# Altium PCB RF-learn-command-1relay.PcbDoc
Units mm, origin at the board's own origin, x right, y up, seen from the top; angles counter-clockwise.
Board outline 72 x 47 mm, 2 copper layers (Top Layer, Bottom Layer); 45 components, 34 nets, 130 pads, 82 vias.
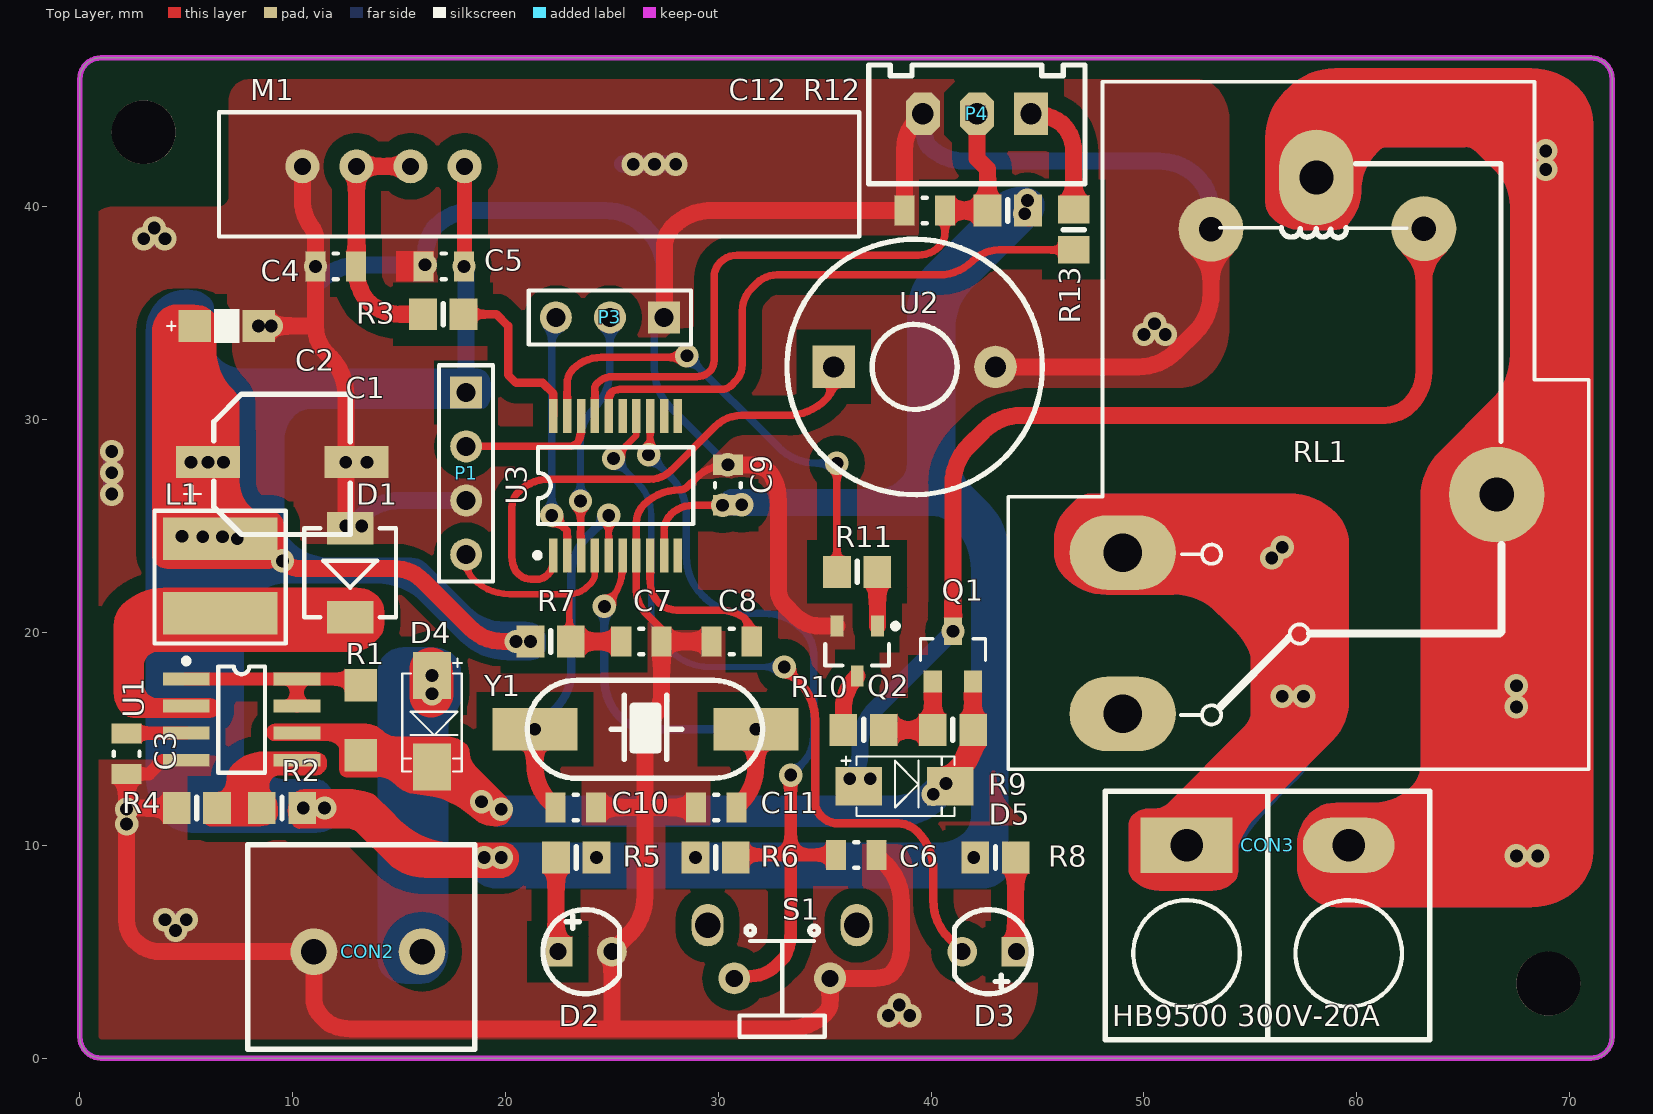
[diagram p0: Top Layer view]
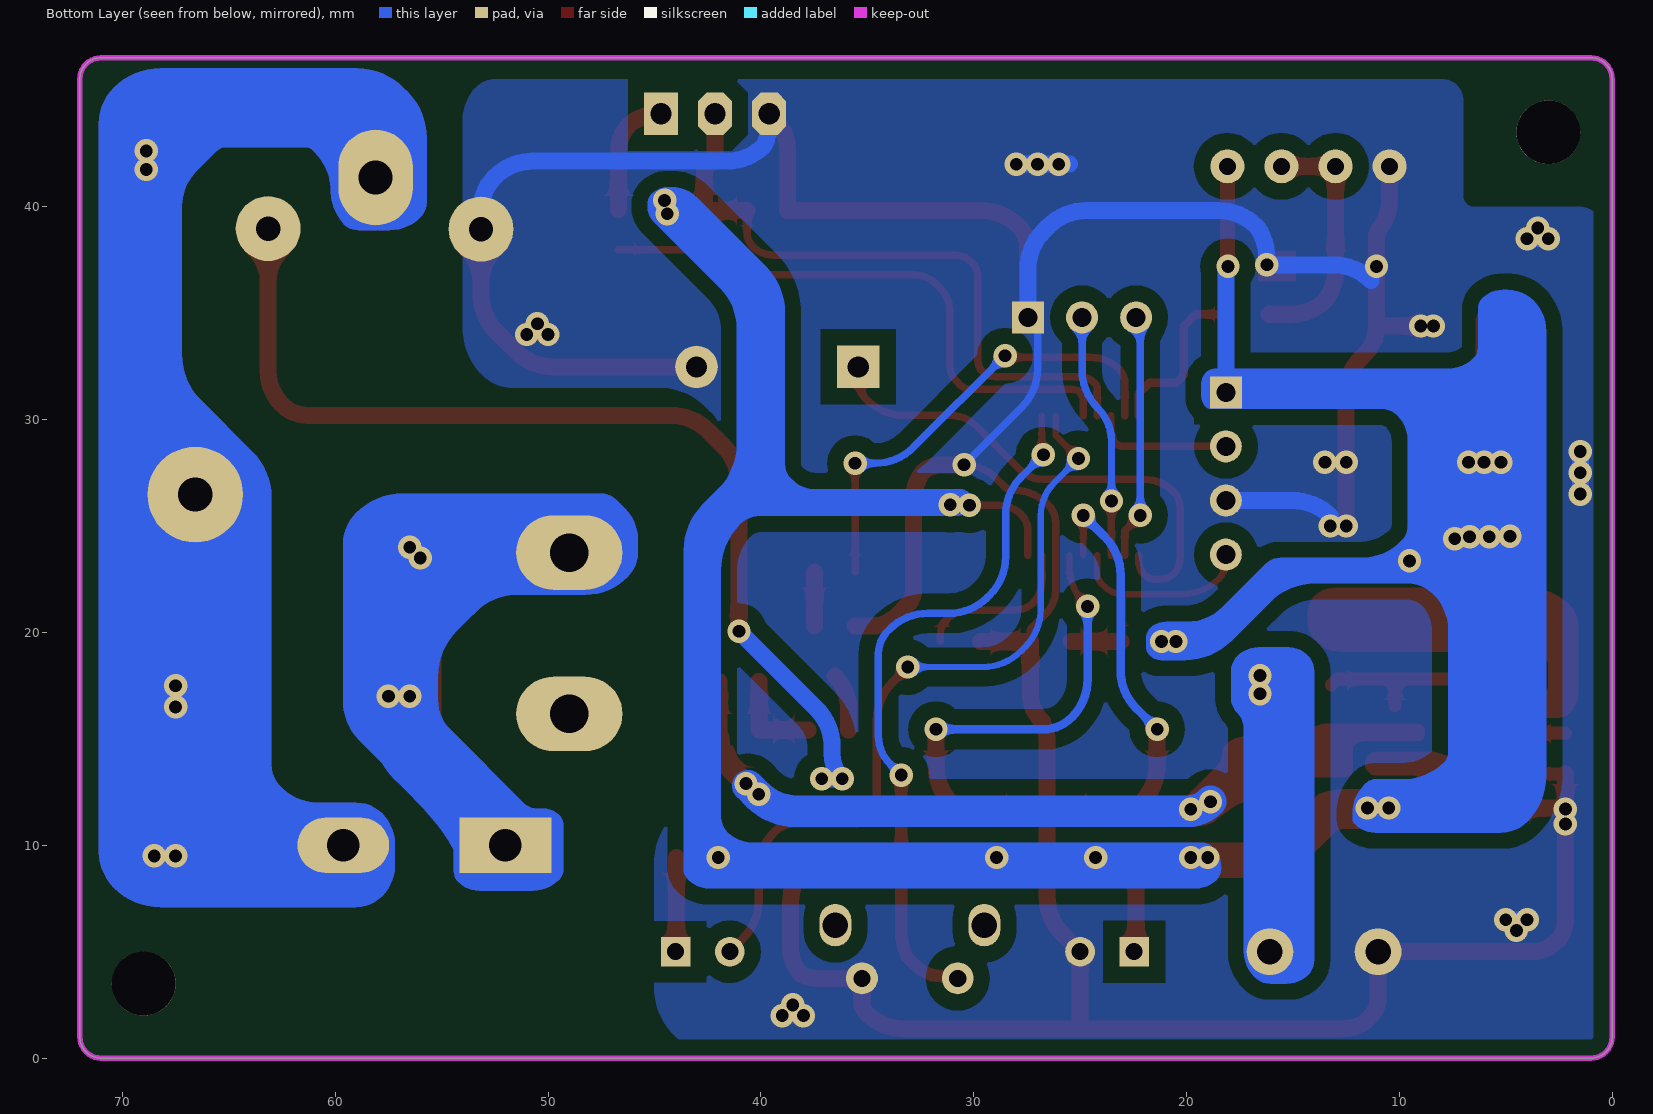
[diagram p1: Bottom Layer view, seen from below]
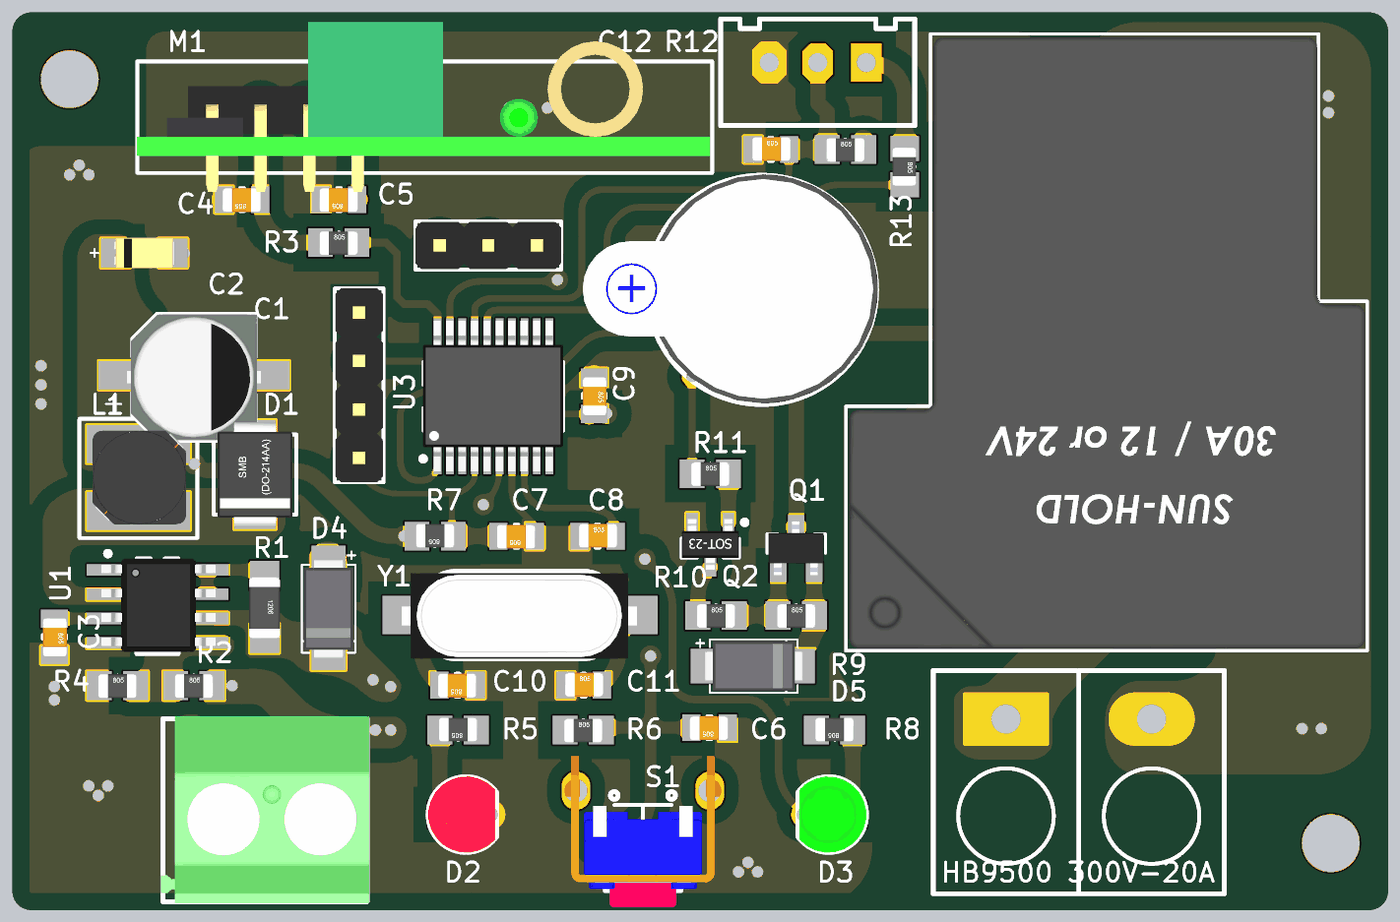
[diagram p2: 3D render of the assembled board from above, using the file's embedded part models]

## Layer stack, top to bottom
Top Solder: solder mask 0.0102, Solder Resist, Dk 3.5
Top Layer: signal copper 0.0356
Dielectric 1: dielectric 0.32, FR-4, Dk 4.8
Bottom Layer: signal copper 0.0356
Bottom Solder: solder mask 0.0102, Solder Resist, Dk 3.5

## Board outline
0,1 ccw(c1,1) 1,0 71,0 ccw(c71,1) 72,1 72,46 ccw(c71,46) 71,47 1,47 ccw(c1,46) 0,46

## Design rules (kind name [scope] priority, off if disabled: settings)
Clearance GND_L01_P001 [InPolygon] p1: gap=0.762
Clearance [All] p2: gap=0.2
PolygonConnect [All] p1: connectstyle=Direct reliefconductorwidth=0.254 reliefentries=4 polygonreliefangle="90 Angle" airgapwidth=0.254
RoomDefinition RF-learn-command-1relay [InComponentClass('RF-learn-command-1relay')] p1: confinementstyle=ConfineIn formatcopy=TRUE lockcomponents=FALSE outline 99,-32 375,-32 375,4 99,4
RoutingVias [All] p1: holewidth=0.6 width=1.1 viastyle="Through Hole" minholewidth=0.5 minwidth=1 maxholewidth=0.7 maxwidth=1.2
SolderMaskExpansion [All] p1: expansion=0.102
UnpouredPolygon [All] p1: allowshelved=TRUE
Width [All] p1: maxlimit=5 minlimit=0.254 preferedwidth=0.8
29 further rules are at their usual default settings.

## Components (designator, comment, footprint, x,y, rotation, side; value= is the part's Value field where it differs from the comment)
C1 "10uF/16V" C1206 5.5,34.4 r0 top
C2 "220uF/16V" "CAPACITOR SIZE_D(D6.6)" 6.019,28 r0 top
C3 "33pF" "CM 0805" 2.2,14.3 r270 top
C4 "33pF" "CM 0805" 12.025,37.2 r180 top
C5 "100n" "CM 0805" 17.098,37.2 r180 top
C6 "100nF" "CM 0805" 36.482,9.548 r180 top
C7 "100nF" "CM 0805" 26.387,19.575 r180 top
C8 "0.1uF" "CM 0805" 30.625,19.575 r0 top
C9 "100nF" "CM 0805" 30.45,26.925 r270 top
C10 "22p" "CM 0805" 23.302,11.775 r180 top
C11 "22p" "CM 0805" 29.9,11.775 r0 top
C12 "100nF" "CM 0805" 39.7,39.825 r0 top
CON2 "Terminal 2" "Terminal 2 5.08" 13.54,5 r180 top
CON3 "Terminal 2" domino-2pin-7.62 55.81,10 r0 top
D1 "SS24" DO-214AA 12.7,24.9 r270 top
D2 "RED LED" LED3mm-R 22.46,5 r0 top
D3 "RED LED" LED3mm-G 44,5 r180 top
D4 "SS14" "DO-214AC (SMA)" 17.05,17.072 r270 top
D5 "SS14" "DO-214AC (SMA)" 37.5,13.275 r0 top
L1 "Inductor Iron" 4848 6.6,24.4 r270 top
M1 "RF_315_RX" Module-RF-RX 18.08,41.9 r180 top
P1 "Header 4" HDR1X4 18.15,31.28 r270 top
P3 "Header 3" HDR1X3 27.45,34.8 r180 top
P4 "Header 3" HEADER_3_W 44.69,44.375 r180 top
Q1 "A1015" SC-43-BCE 41.025,18.875 r0 top
Q2 "C1815" 2SC1815 36.525,19.125 r270 top
R1 "0.15/R1206" R1206 13.2,17.527 r270 top
R2 "3K/1%" R0805 9.5,11.75 r0 top
R3 "4.7k" R0805 17.075,34.95 r0 top
R4 "1K/1%" R0805 5.5,11.75 r0 top
R5 "1K" R0805 23.325,9.425 r180 top
R6 "10K" R0805 29.877,9.425 r0 top
R7 "10k" R0805 22.125,19.575 r180 top
R8 "1K" R0805 43.025,9.425 r180 top
R9 "4.7k" R0805 41.025,15.425 r0 top
R10 "4.7k" R0805 36.825,15.425 r0 top
R11 "2.2k" R0805 36.525,22.85 r0 top
R12 "10k" R0805 43.6,39.825 r0 top
R13 "1k" R0805 46.7,38.925 r270 top
RL1 "Relay SPDT, 10A, 12V" RL-SLA-24/12VDC-SL-C 58.1,41.375 r270 top
S1 "SW-SMD" "Button Tactile Switch" 33,5 r0 top
U1 "MC34063" SO8-150mil 7.6,15.905 r270 top
U2 "Buzzer" Buzzer 39.225,32.475 r0 top
U3 "STM8S003F3P6TR" SSOP-20 25.175,26.9 r0 top
Y1 "8MHz" HC49/US-SMD 26.575,15.45 r0 top

## Footprints (in the part's own frame and the unit in brackets; to place one, negate y for a bottom-side part, rotate by r counter-clockwise, add the part's x,y. Pads: shape width x height; smd on the part's side, far side on the other; paste and mask are expansions set on the pad)
2SC1815 [mm] "2SC1815 SMD"
  rect 1x0.6 smd: 1(-1.175,0.95) 2(-1.175,-0.95) 3(1.175,0)
  silkscreen extent -1.3,-1.5 0.67,1.93, body extent -1.34,-1.5 1.3,1.5, height 1.08
4848 [mm]
  rect 2x5.4 smd: 1(0,0) 2(3.5,0)
  silkscreen extent -1.32,-3.09 4.92,3.08, body extent -0.7,-2.4 4.2,2.5, height 2.91
"Button Tactile Switch" [mm]
  oval 1.5x2 hole 1.2: 0(-3.5,1.25) 0(3.5,1.25)
  round 1.5 hole 0.8: 1(-2.25,-1.25) 2(2.25,-1.25)
  silkscreen extent -2,-4 2,1.2, body extent -4.25,-4.85 4.25,3.05, height 7.4
Buzzer [mm]
  rect 2x2 hole 1: 1(-3.8,0)
  round 2 hole 1: 2(3.8,0)
  silkscreen extent -6,-6 6,6, body extent -9.37,-5.95 6.08,6.05, height 9.65
C1206 [mil]
  rect 60x60 smd: 1(-3.93,0) 2(114.18,0)
  silkscreen extent -55,-31 79,31, body extent -8,-31 118,31, height 63
"CAPACITOR SIZE_D(D6.6)" [mm]
  rect 3x1.5 smd: 1(0,0) 2(6.981,0)
  silkscreen extent -1.12,-3.4 6.68,3.2, body extent -0.02,-3.4 6.98,3.2, height 5.41
"CM 0805" [mm]
  rect 0.95x1.4 smd: 1(-0.95,0) 2(0.95,0)
  silkscreen extent -0.1,-0.6 0.1,0.6, body extent -0.97,-0.6 1.03,0.65, height 0.78
DO-214AA [mm] "DO-214-AA/SMB; 2 C-Bend Leads; Body 5.3 x 3.6 mm, inc. leads (LxW)"
  rect 1.52x2.18 smd: 1(0,0) 2(4.191,0)
  silkscreen extent 0,-2.16 4.19,2.16, body extent -0.65,-1.95 4.85,1.95, height 2.45
"DO-214AC (SMA)" [mm]
  rect 2.2x1.8 smd: 1(-0.899,-0.5) 2(3.397,-0.5)
  silkscreen extent -1.7,-1.9 3.6,0.9, body extent -1.3,-1.8 3.9,0.8, height 2.3
domino-2pin-7.62 [mil] "domino-2pin-7.62"
  rect 170x101.89 hole 60: 1(-150,0)
  oval 170x101.89 hole 60: 2(150,0)
  silkscreen extent -300,-360 300,100
HC49/US-SMD [mm] "HC-49/U SMD Low Profile XTAL"
  rect 4x2 smd: 1(-5.195,0) 2(5.195,0)
  silkscreen extent -5.55,-2.3 5.51,2.3, body extent -6.2,-2.3 6.1,2.2, height 5.18
HDR1X3 [mm] "Connector; Header; 3 Position"
  rect 1.5x1.5 hole 0.9: 1(0,0)
  round 1.5 hole 0.9: 2(2.54,0) 3(5.08,0)
  silkscreen extent -1.27,-1.27 6.35,1.27, body extent -1.27,-1.24 6.35,1.25, height 8.54
HDR1X4 [mm] "Connector; Header; 4 Position"
  rect 1.5x1.5 hole 0.9: 1(0,0)
  round 1.5 hole 0.9: 2(2.54,0) 3(5.08,0) 4(7.62,0)
  silkscreen extent -1.27,-1.27 8.89,1.27, body extent -1.28,-1.25 8.88,1.24, height 8.54
HEADER_3_W [mm]
  rect 1.6x2 hole 1: 1(0,0)
  oct 1.6x2 hole 1: 2(2.54,0) 3(5.08,0)
  silkscreen extent -2.54,-2.29 7.62,3.3
LED3mm-G [mm]
  rect 1.4x1.4 hole 0.8: 1(0,0)
  round 1.4 hole 0.8: 2(2.54,0)
  silkscreen extent -0.7,-1.98 2.9,1.98, body extent -0.68,-1.99 2.8,1.99, height 5.2
LED3mm-R [mm]
  rect 1.4x1.4 hole 0.8: 1(0,0)
  round 1.4 hole 0.8: 2(2.54,0)
  silkscreen extent -0.7,-1.98 2.9,1.98, body extent -0.68,-1.99 2.8,1.99, height 5.2
Module-RF-RX [mm] "Module_RF_T"
  round 1.6 hole 0.8: 1(0,0) 2(2.54,0) 3(5.08,0) 4(7.62,0)
  silkscreen extent -18.54,-2.54 11.54,3.3, body extent -18.43,-4.59 11.57,4.29, height 17.5
R0805 [mm] "Chip Resistor; Body 2.0 x 1.2 mm (LxW typ)"
  rect 1.3x1.5 smd: 1(0.95,0) 2(-0.95,0)
  silkscreen extent 0,-0.5 0,0.5, body extent -1,-0.65 1,0.6, height 0.78
R1206 [mil]
  rect 60x60 smd: 1(0,0) 2(130,0)
  body extent 4,-31 130,31, height 39
RL-SLA-24/12VDC-SL-C [mm] "Relay 12V30A 5C SLA-12VDC-SL-A"
  oval 4.5x3.5 hole 1.6: 1(0,0)
  round 4.5 hole 1.6: 1(14.9,8.475)
  oval 3.5x5 hole 1.8: 2(25.2,-9.1) 3(17.625,-9.1)
  round 3.048 hole 1.143: 4(2.425,-4.95) 5(2.4,5.05)
  silkscreen extent -4.5,-14.48 27.8,12.8, body extent -4.33,-14.3 27.68,12.7, height 20.2
SC-43-BCE [mil]
  rect 34x40 smd: B(-37.02,-46.5) E(37.02,-46.5)
  rect 34x50 smd: C(0.02,46.5)
  silkscreen extent -60,-8 60,32, body extent -57,-52 57,58, height 41
SO8-150mil [mm] "Small Outline; 8 Leads; Body Width 3.9 mm; Pitch 1.27 mm"
  rect 0.6x2.2 smd: 1(-1.905,-2.6) 2(-0.635,-2.6) 3(0.635,-2.6) 4(1.905,-2.6) 5(1.905,2.6) 6(0.635,2.6) 7(-0.635,2.6) 8(-1.905,2.6)
  silkscreen extent -2.88,-2.72 2.5,1.1, body extent -2.5,-2.95 2.4,3.05, height 1.7
SSOP-20 [mm] "SSOP, Plastic; 20 Leads; Body Width 5.3 mm; Pitch 0.65 mm"
  rect 0.4x1.6 smd: 1(-2.925,-3.275) 2(-2.275,-3.275) 3(-1.625,-3.275) 4(-0.975,-3.275) 5(-0.325,-3.275) 6(0.325,-3.275) 7(0.975,-3.275) 8(1.625,-3.275) 9(2.275,-3.275) 10(2.925,-3.275) 11(2.925,3.275) 12(2.275,3.275) 13(1.625,3.275) 14(0.975,3.275) 15(0.325,3.275) 16(-0.325,3.275) 17(-0.975,3.275) 18(-1.625,3.275) 19(-2.275,3.275) 20(-2.925,3.275)
  silkscreen extent -3.8,-3.4 3.65,1.8, body extent -3.68,-3.94 3.65,3.96, height 1.98
"Terminal 2 5.08" [mm] "Terminal block 5.08mm 2 ways"
  round 2.2 hole 1.2: 1(-2.54,0) 2(2.54,0)
  silkscreen extent -5.02,-5.02 5.65,4.57, body extent -5.13,-5.15 5.78,4.65, height 14.2

## Part data
C1 C2: library part "Cap Pol3", "Polarized Capacitor (Surface Mount)"
C3 C4 C5: library part "Cap Semi", "Capacitor 100n 16V 0603"
C6 C7 C8 C9 C12: library part "CM Ceramic", "SMD Ceramic  Capacitor"
C10 C11: library part "Cap Semi", "Capacitor (Semiconductor SIM Model)"
D1: library part "D Schottky", "Schottky Diode"
D2 D3: library part LED2, "LED SUPR RED CLR 0805 RT ANG SMD"
D4 D5: library part Diode, "DIODE GEN PURPOSE 1000V 1A SMA"
L1: "Magnetic-Core Inductor"
M1: library part ModuleRF-RX
P1: "Header, 4-Pin"
P3 P4: "Header, 3-Pin"
Q1: library part "PNP Transistor"
Q2: "NPN SMD Transistor"
R1 R2 R4 R5 R6 R8: library part Res3, "Resistor 10k 0603"
R3 R7 R9 R10 R11 R12 R13: library part Res3, "Resistor"
RL1: library part "Relay 1", "Relay SPDT,10A - 12VDC 5 Pin"
S1: "Switch"
U3: library part STM8S003F3, "MCU"
Y1: library part XTAL, "Crystal Oscillator"

## Free pads (board coordinates)
  round 3 hole 3: 0(3,43.5) 0(69,3.5)

## Via types
v1: diameter 1.1, hole 0.6, Top Layer to Bottom Layer, tented both sides, 58 vias
v2: diameter 1.1, hole 0.6, Top Layer to Bottom Layer, tented bottom, 23 vias
v3: diameter 1.1, hole 0.6, Top Layer to Bottom Layer, 1 vias

## Nets (pads, with @x,y where several pads share a name; then routed paths per layer and width w, separated by ;. In a path a pad name is that pad's centre, name@x,y a point inside that pad or via, vN(x,y) a via of type N, cw(c..) or ccw(c..) an arc to the next point about the centre after c; other vN are vias at no path point)
5V: C1.1 C2.1 C5.1 C9.2 L1.1 M1.1 P1.1 R2.1 R5.2 R6.2 R7.1 R8.1 R12.1 U3.9 | length 147.9
  Top Layer w0.35: U3.9 27.45,24.783 cw(c28.517,24.783) 27.762,25.537 ; 27.763,25.538 cw(c28.819,24.481) 28.819,25.975 v1(30.2,25.975) C9.2@30.425,25.975 ; C9.2 30.475,26 C9.2@31.065,26 ; C9.2@31.065,26 v1(31.1,26) cw(c31.04,26.06) 31.04,25.975 C9.2@31.065,26
  Top Layer w0.7: v3(18.05,37.2) v3(18.05,37.2) 18.08,37.23 M1.1
  Top Layer w0.8: v2(5.225,28) v2(6.019,28) v2(6.75,28) ; C1.1 5.4,28.619 C2.1@5.622,28.397 ; L1.1 v2(7.4,24.4) ; L1.1@9.226,23.656 v1(9.522,23.359) ccw(c10.39,24.227) 10.39,23 14.772,23 cw(c14.772,21.122) 16.099,22.451 ; R2.1 v1(10.5,11.75) v1(11.5,11.75) 13.175,11.75 15.5,9.425 v1(19,9.425) v1(19.8,9.425) ; 16.1,22.45 18.321,20.229 ccw(c19.9,21.808) 19.9,19.575 v1(20.5,19.575) v2(21.175,19.575) ; R12.1 v1(44.4,39.675) R12.1@44.6,39.475
  Bottom Layer w0.8: v2@5.775,27.756 v2(5.775,24.5) 5.775,12.75 6.775,11.75 v1(10.5,11.75) ; v2@6.75,28.15 6.75,30.1 7.93,31.28 P1.1 18.15,36.959 ccw(c17.809,36.959) v3(18.05,37.2) ; v1(19.8,9.425) v2(24.275,9.425) v2(28.927,9.425) v2(42,9.425) 42.9,10.325 42.9,24.4 41.35,25.95 40.4,25.95 ; v1@31.04,25.95 40.4,25.95 ; v1@44.075,39.425 40.4,35.75 40.4,25.95
  other v1: 44.525,40.3
  other v2: 6.7,24.5 4.8,24.525
+12V: D4.2 D5.2 Q1.E R1.2 R9.1 U1.6 | length 39.3
  Top Layer w0.6: U1.6 12.155,15.27 R1.2
  Top Layer w0.8: Q1.E 41.965,15.435 R9.1 R9.1@41.975,15.059
  Top Layer w1: R1.2 16,14.225 D4.2 17.275,13.675 18.875,12.075 v1(18.875,12.05) ; v1(40.1,12.4) 40.529,12.829 cw(c40.7,12.659) v1(40.7,12.9) 41.35,13.55 ccw(c39.841,15.059) R9.1@41.975,15.059
  Bottom Layer w1: v1(18.875,12.05) ccw(c19.73,12.905) 19.73,11.696 v1(19.8,11.696)
  Bottom Layer w1.5: v1(18.875,12.05) ccw(c19.961,13.136) 19.961,11.6 38.348,11.6 ccw(c38.348,14.14) 40.144,12.344 v1@40.596,12.796
BUTTON: C12.2 P4.2 R12.2 U3.17 | length 31.3
  Top Layer w0.35: U3.17 24.2,31.459 cw(c24.541,31.459) 24.3,31.7 24.323,31.723 cw(c25.046,31) 25.046,32.023 29,32.023 ccw(c29,32.862) 29.593,32.268 ; 29.594,32.269 ccw(c29.095,32.767) 29.8,32.767 29.8,36.676 cw(c30.824,36.676) 30.1,37.4 cw(c30.885,36.615) 30.885,37.725 39.4,37.725 ccw(c39.4,39.113) 40.381,38.131 ; 40.382,38.132 ccw(c39.734,38.78) 40.65,38.78 C12.2
  Top Layer w0.8: C12.2 R12.2 42.65,41.775 42.15,42.275 P4.2
BUZZER: U2.1 U3.1 | length 24
  Top Layer w0.35: 21.975,22.707 cw(c21.476,23.206) 21.476,22.5 21.209,22.5 cw(c21.209,23.351) 20.607,22.749 20.497,22.859 cw(c21.666,23.566) 20.3,23.566 20.3,25.876 cw(c21.324,25.876) 20.6,26.6 cw(c22.049,25.151) 22.049,27.2 24.665,27.2 24.669,27.196 26.764,27.196 ccw(c26.764,28.661) 27.799,27.624 ; 21.976,22.707 ccw(c21.312,23.37) 22.25,23.37 U3.1 ; 27.8,27.625 29.862,29.687 cw(c31.1,28.45) 31.1,30.2 33.248,30.2 ccw(c33.248,32.74) 35.044,30.944 ccw(c34.124,31.864) 35.425,31.864 U2.1
DATA: R3.1 U3.20 | length 8.2
  Top Layer w0.4: R3.1 19.575,34.95 20.125,34.4 20.125,32.1 20.5,31.725 21.75,31.725 22.25,31.225 U3.20
GND: C1.2 C2.2 C3.2 C4.2 C5.2 C6.1 C7.1 C8.1 C9.1 C10.1 C11.1 C12.1 CON2.2 D1.1 D2.2 M1.4 P1.3 P3.1 P4.3 Q2.2 R4.2 RL1.4 S1.2 U1.4 U2.2 U3.7 | length 227.9
  Top Layer w0.35: C7.1 27.337,20.1 ccw(c27.184,20.1) 27.292,20.208 26.6,20.9 cw(c27.686,21.986) 26.16,21.815 cw(c27.686,21.986) 26.15,21.986 U3.7 26.15,25.155 cw(c27.345,25.155) 26.5,26 cw(c28.19,24.31) 28.19,26.7 ccw(c28.19,27.207) 28.549,26.849 28.956,27.256 cw(c30.45,25.763) v2(30.45,27.875)
  Top Layer w0.6: C3.2 3.25,13.35 3.9,14 U1.4
  Top Layer w0.8: C3.2 v1(2.2,11.7) ; R4.2 2.25,11.75 v1(2.2,11.7) ; v1(8.4,34.4) v1(9,34.4) 11.05,34.4 11.075,34.375 ; M1.4 10.46,40.31 ccw(c12.56,40.31) 10.962,38.948 cw(c10.044,38.478) 11.075,38.478 v2(11.075,37.2) 11.075,34.375 ; D1.1 D1.1@12.8,25 ; v2(13.25,25) D1.1@12.8,25 ; C10.1 26.1,11.775 ; 27.2,16.4 ccw(c28.769,14.831) 27.161,16.36 ; P3.1@27.465,34.788 27.465,38.077 cw(c28.885,38.077) 27.881,39.081 cw(c29.677,37.285) 29.354,39.804 cw(c29.677,37.285) 29.677,39.825 C12.1 38.75,42.7 cw(c40.718,42.7) 39.326,44.091 P4.3 ; C11.1 26.55,11.775 ; C8.1 C7.1 27.337,17.159 cw(c25.432,17.159) 27.161,16.36 ; v2(30.45,27.875) 31.513,27.875 cw(c31.513,26.565) 32.439,27.491 cw(c30.471,26.2) 32.825,26.2 32.825,22 ccw(c33.851,22) 33.126,21.274 33.6,20.8 ccw(c34.807,22.007) 34.807,20.3 Q2.2 ; C6.1 37.856,9.124 cw(c36.06,7.328) 38.6,7.328 38.6,5.147 cw(c36.863,5.147) 38.091,3.919 cw(c37.333,5.542) 37.333,3.75 S1.2 35.25,2.616 cw(c34.546,2.616) 35.044,2.119 cw(c33.248,3.915) 33.248,1.375 25,1.375 ; v1(38,2) v1(39,2) v1(38.5,2.5) ; U2.2 49.723,32.475 ccw(c49.723,35.015) 51.519,33.219 52.406,34.106 ccw(c50.61,35.902) 53.15,35.902 RL1.4 ; v1(50,34) v1(50.5,34.5) v1(51,34) ; v1(2.2,11.7) v1(2.2,11) 2.2,6.466 ccw(c3.566,6.466) 2.6,5.5 ccw(c3.807,6.707) 3.807,5 CON2.2 11,2.828 ccw(c12.225,2.828) 11.359,1.961 11.677,1.643 ccw(c12.736,3.6) 12.736,1.375 25,1.375 ; 11.075,34.375 11.075,34.367 ccw(c12.867,34.367) 11.6,33.1 11.756,32.944 cw(c9.96,31.148) 12.5,31.148 v2(12.5,28) v2(12.5,25) D1.1@12.8,25 ; 25,1.375 D2.2 25.806,5.806 ccw(c24.01,7.602) 26.55,7.602 26.55,11.775 ; 26.55,11.775 26.55,14.831 cw(c28.769,14.831) 26.779,15.812 ccw(c25.432,17.159) 27.161,16.36
  Bottom Layer w0.35: P3.1 27,34.35 27,33.8 27,32.377 ccw(c29.54,32.377) 27.742,30.583 ccw(c29.54,32.377) 27.744,30.581 v2(30.45,27.875)
  Bottom Layer w0.8: v1(1.5,26.5) v1(1.5,27.5) v1(1.5,28.5) ; v1(3,38.5) v1(4,38.5) v1(3.5,39) ; v1(4,6.5) v1(5,6.5) v1(4.5,6) ; 11.331,36.531 cw(c13.127,34.735) 13.127,37.275 v2(16.225,37.275) 16.225,37.598 cw(c18.765,37.598) 16.664,39.025 16.72,39.081 cw(c18.516,37.285) 18.516,39.825 24.698,39.825 cw(c24.698,37.285) 26.494,39.081 26.706,38.869 cw(c24.91,37.073) 27.45,37.073 P3.1 ; v2@13.231,25.456 cw(c15.027,23.66) 15.027,26.2 P1.3 ; v1@25.5,42 v1(26,42) v1(27,42) v1(28,42) ; P4.3 39.61,43.942 ccw(c42.15,43.942) 39.845,42.875 ccw(c41.604,44.634) 41.604,42.146 50.702,42.146 cw(c50.702,39.606) 51.551,42 cw(c50.702,39.606) 52.498,41.402 cw(c50.924,39.828) 53.15,39.828 RL1.4
  other v2: 13.5,28
LEARN: C6.2 R6.1 S1.1 U3.13 | length 39.5
  Top Layer w0.3: v1(26.725,28.35) 26.8,28.425 U3.13 ; R6.1 33.4,9.425
  Top Layer w0.6: R6.1 cw(c31.125,9.127) 31.125,9.548 33.4,9.548 ; 31.5,3.852 ccw(c31.5,5.588) 32.727,4.36 33.11,4.743 ccw(c30.86,5.922) 33.4,5.922 33.4,9.425 ; v1(33.4,13.3) 33.4,9.548 ; C6.2 33.4,9.548
  Bottom Layer w0.35: v1(26.725,28.35) 27.756,27.319 cw(c25.96,25.523) 28.127,26.848 cw(c25.96,25.523) 28.5,25.523 28.5,23.552 ccw(c31.04,23.552) 29.244,21.756 29.356,21.644 ccw(c31.152,23.44) 31.152,20.9 32.148,20.9 cw(c32.148,18.36) 33.944,20.156 34.033,20.067 cw(c32.966,19) 34.475,19 34.475,15.127 cw(c32.659,15.127) 33.943,13.843 v1(33.4,13.3)
NetC3_1: C3.1 U1.3 | length 2.8
  Top Layer w0.6: C3.1 2.22,15.27 U1.3
NetC4_1: C4.1 M1.2 M1.3 R3.2 | length 11.8
  Top Layer w0.8: M1.2 M1.3 13,37.225 C4.1 12.975,37.127 ccw(c15.515,37.127) 13.479,35.608 ccw(c15.068,37.197) 15.068,34.95 R3.2
NetC8_2: C8.2 U3.8 | length 7.7
  Top Layer w0.35: U3.8 26.8,22.366 ccw(c28.166,22.366) 26.8,22.35 ccw(c28.166,22.366) 27.2,21.4 ccw(c28.045,22.245) 28.045,21.05 30.006,21.05 cw(c30.006,18.831) 31.225,20.685 cw(c30.379,19.839) 31.575,19.839 C8.2
NetCON2_1: CON2.1 D4.1 | length 14.4
  Top Layer w2: D4.1@16.5,18.3 16.5,17 ccw(c16.379,17.121) v2(16.55,17.121) v2(16.55,17.971)
  Bottom Layer w2: CON2.1 v2@16.08,17.121
NetCON3_1: CON3.1 RL1.3 | length 53.7
  Top Layer w3: RL1.3 54.125,23.75 56.5,21.375 v1(56.5,17) 56.5,16.225 57.15,15.575 52,10.425 CON3.1 ; v1(56,23.5) 57.5,22 ; v1(56.5,24) 57.5,23 57.5,22 ; v1(57.5,17) 57.5,22
  Bottom Layer w3: RL1.3 53.398,23.75 cw(c53.398,21.21) 55.194,23.006 56.156,22.044 cw(c54.36,20.248) 56.9,20.248 56.9,15.952 cw(c54.36,15.952) 56.156,14.156 CON3.1
NetCON3_2: CON3.2 RL1.1 | length 64.9
  Top Layer w3: RL1.1@58.1,41.375 58.1,43.2 59.55,44.65 65.975,44.65 ; v1(67.5,9.5) v1(68.5,9.5) ; v1@67.5,16 v1(67.5,16.5) v1(67.5,17.5) ; v1(68.875,41.75) v1(68.875,42.625)
  Bottom Layer w3: RL1.1@58.1,41.375 58.1,43.717 cw(c58.783,43.717) 58.3,44.2 cw(c59.99,42.51) 59.99,44.9 65.548,44.9 cw(c65.548,42.36) 67.344,44.156 68.356,43.144 ; CON3.2 63.748,10 ccw(c63.748,12.54) 65.544,10.744 65.831,11.031 ccw(c64.035,12.827) 66.575,12.827 66.575,16 ; 66.575,16.5 66.575,26.475 68.356,28.256 ccw(c66.56,30.052) 69.1,30.052 v1@69.1,41.348
NetD1_2: D1.2 L1.2 U1.2 | length 16.4
  Top Layer w0.6: L1.2@4.9,20.9 3.1,20.9 2.6,20.4 2.6,17.04 3.1,16.54 U1.2
  Top Layer w1: L1.2@4.9,20.9 5.091,20.709 D1.2
NetD2_1: D2.1 R5.1 | length 4.5
  Top Layer w0.8: R5.1 22.375,5.085 D2.1
NetD3_1: D3.1 R8.2 | length 4.4
  Top Layer w0.8: R8.2 43.975,5.025 D3.1
NetD3_2: D3.2 U3.14 | length 36.5
  Top Layer w0.3: v1(25.075,28.175) 25.075,28.179 26.15,29.254 U3.14
  Top Layer w0.4: v1(33.1,18.375) 33.806,17.669 cw(c32.01,15.873) 34.55,15.873 34.55,12.004 ccw(c35.404,12.004) 34.8,11.4 34.839,11.361 ccw(c35.65,12.172) 35.65,11.025 38.445,11.025 cw(c38.445,9.745) 39.35,10.65 39.356,10.644 cw(c37.56,8.848) 40.1,8.848 40.1,7.412 ccw(c42.64,7.412) 40.844,5.616 D3.2
  Bottom Layer w0.3: v1(25.075,28.175) 26.214,27.036 ; 26.214,27.036 cw(c24.677,25.5) 26.85,25.5 26.85,21.102 ccw(c29.39,21.102) 27.594,19.306 27.781,19.119 ccw(c29.577,20.915) 29.577,18.375 v1(33.1,18.375)
NetD5_1: D5.1 Q1.C RL1.5 | length 48.5
  Top Layer w0.8: v1(41.025,20.056) 41.025,26.973 cw(c43.565,26.973) 41.769,28.769 42.456,29.456 cw(c44.252,27.66) 44.252,30.2 61.293,30.2 ccw(c61.293,31.907) 62.5,30.7 ccw(c60.931,32.269) 63.15,32.269 RL1.5
  Bottom Layer w0.8: v1@37.2,13.1 ccw(c37.14,13.04) v1(37.14,13.125) v1(36.175,13.125) ccw(c35.028,14.272) 36.65,14.272 36.65,14.629 cw(c39.19,14.629) 37.394,16.425 v1(41.025,20.056)
NetP4_1: P4.1 R13.2 | length 5.7
  Top Layer w0.8: P4.1 cw(c44.69,41.876) 46.148,43.906 cw(c44.815,42.572) 46.7,42.572 R13.2
NetQ1_B: Q1.B R9.2 R10.1 | length 4.6
  Top Layer w0.8: R10.1 R9.2 40.085,15.435 Q1.B
NetQ2_1: Q2.1 R11.1 | length 2.6
  Top Layer w0.8: Q2.1 R11.1
NetQ2_3: Q2.3 R10.2 | length 2.7
  Top Layer w0.8: R10.2 35.875,16.381 cw(c38.094,16.381) Q2.3
NetR1_1: R1.1 U1.1 U1.7 U1.8 | length 9.6
  Top Layer w0.6: U1.1 U1.8 ; U1.7 U1.8 ; R1.1 12.917,17.81 U1.8
NetR2_2: R2.2 R4.1 U1.5 | length 5.8
  Top Layer w0.6: R2.2@8.5,11.75 8.5,13.6 8.9,14 U1.5
  Top Layer w0.8: R4.1 R2.2@8.5,11.75
NRST: C7.2 P1.4 R7.2 U3.4 | length 13.1
  Top Layer w0.3: P1.4 18.15,23.345 ccw(c19.345,23.345) 18.5,22.5 ccw(c20.19,24.19) 20.19,21.8 23.005,21.8 ; R7.2 cw(c23.244,19.744) 23.005,19.744 23.005,21.8 ; 24.025,22.325 23.849,22.149 cw(c23.005,22.995) 23.005,21.8 ; 24.026,22.326 ccw(c23.603,22.747) 24.2,22.747 U3.4
  Top Layer w0.8: R7.2 C7.2
OSC_IN: C10.2 U3.5 Y1.1 | length 17.1
  Top Layer w0.3: U3.5 v1(24.85,25.5)
  Top Layer w0.8: v2(21.38,15.45) 21.38,13.799 ccw(c23.92,13.799) 22.124,12.003 C10.2
  Bottom Layer w0.4: v2(21.38,15.45) 22.356,16.426 ccw(c20.56,18.222) 23.1,18.222 23.1,22.698 cw(c25.64,22.698) 23.844,24.494 v1(24.85,25.5)
OSC_OUT: C11.2 U3.6 Y1.2 | length 18.5
  Top Layer w0.3: v1(24.65,21.225) 24.8,21.375 ccw(c23.11,23.065) 24.801,21.376 ccw(c23.11,23.065) 25.5,23.065 U3.6
  Top Layer w0.8: C11.2 31.026,11.951 ccw(c29.23,13.747) 31.77,13.747 v2(31.77,15.45)
  Bottom Layer w0.4: v1(24.65,21.225) 24.65,17.802 ccw(c27.19,17.802) 25.394,16.006 ccw(c26.736,17.348) 26.736,15.45 v2(31.77,15.45)
RELAY: R11.2 U3.19 | length 22
  Top Layer w0.35: U3.19 22.9,31.708 cw(c23.846,31.708) 23.177,32.377 cw(c24.5,31.054) 24.5,32.925 28.45,32.925 v1(28.527,33.002) 28.551,33.002 28.601,32.951 v1@28.6,32.95 ; R11.2 v2(35.575,27.95)
  Bottom Layer w0.35: v1(28.527,33.002) 32.834,28.694 ccw(c34.63,30.49) 34.63,27.95 v2(35.575,27.95)
RX: P3.2 U3.3 | length 11.6
  Top Layer w0.35: v1(23.525,26.175) 23.529,26.171 23.529,23.646 U3.3
  Bottom Layer w0.35: v1(23.525,26.175) 23.525,28.993 cw(c25.714,28.993) 24.165,30.54 cw(c25.714,28.993) 24.166,30.541 ccw(c22.37,32.337) 24.75,31.45 ccw(c22.37,32.337) 24.91,32.337 P3.2
SCL: U3.12
SDA: U3.11
STATUS: R13.1 U3.16 | length 27.4
  Top Layer w0.35: U3.16 24.85,30.967 cw(c25.338,30.967) 24.993,31.312 cw(c25.378,30.672) 25.378,31.419 30.162,31.419 ccw(c30.162,32.038) 30.6,31.6 30.8,31.8 ccw(c30.015,32.585) 31.125,32.585 31.125,35.1 cw(c32.634,35.1) 31.567,36.167 31.8,36.4 cw(c32.766,35.434) 32.766,36.8 40.362,36.8 ccw(c40.362,39.066) 41.963,37.463 ; 41.963,37.463 cw(c43.199,36.226) 43.199,37.975 R13.1
SWIM: P1.2 U3.18 | length 6.6
  Top Layer w0.35: P1.2 22.942,28.74 ccw(c22.942,29.392) 23.402,28.931 ccw(c22.69,29.413) 23.55,29.413 U3.18
TX: P3.3 U3.2 | length 11.5
  Top Layer w0.35: v1(22.175,25.5) 22.9,24.775 U3.2
  Bottom Layer w0.35: v1(22.175,25.5) 22.175,34.293 cw(c22.892,34.293) P3.3@22.385,34.8
pads on no net: RL1.2 S1.0 U3.10 U3.15

## Polygon pours and split planes (outlines as drawn)
GND on Top Layer "GND_L01_P001" (solid, pour order 1): 0.5,1.5 ccw(c1.5,1.5) 1.5,0.5 42.649,0.5 ccw(c42.649,2.555) 44.102,1.102 ccw(c41.934,3.27) 45,3.27 45,9.23 ccw(c41.934,9.23) 44.102,11.398 43.898,11.602 cw(c46.066,13.77) 43,13.77 43,17.149 ccw(c40.945,17.149) 42.398,18.602 cw(c44.566,20.77) 41.5,20.77 41.5,28.23 cw(c44.566,28.23) 42.398,30.398 42.602,30.602 cw(c44.77,28.434) 44.77,31.5 51.649,31.5 ccw(c51.649,33.555) 53.102,32.102 ccw(c50.934,34.27) 54,34.27 54,44.086 ccw(c51.793,44.086) 53.354,45.646 ccw(c52.5,44.793) 52.5,46 8,46 ccw(c8,45) 7,45 7,40.5 cw(c6.5,40.5) 6.5,40 1.5,40 ccw(c1.5,39) 0.5,39
GND on Mechanical 15 "TOP-GND" (none): 0.5,1.5 ccw(c1.5,1.5) 1.5,0.5 42.649,0.5 ccw(c42.649,2.555) 44.102,1.102 ccw(c41.934,3.27) 45,3.27 45,9.23 ccw(c41.934,9.23) 44.102,11.398 43.898,11.602 cw(c46.066,13.77) 43,13.77 43,17.149 ccw(c40.945,17.149) 42.398,18.602 cw(c44.566,20.77) 41.5,20.77 41.5,28.23 cw(c44.566,28.23) 42.398,30.398 42.602,30.602 cw(c44.77,28.434) 44.77,31.5 51.649,31.5 ccw(c51.649,33.555) 53.102,32.102 ccw(c50.934,34.27) 54,34.27 54,44.086 ccw(c51.793,44.086) 53.354,45.646 ccw(c52.5,44.793) 52.5,46 8,46 ccw(c8,45) 7,45 7,40.5 cw(c6.5,40.5) 6.5,40 1.5,40 ccw(c1.5,39) 0.5,39
GND on Bottom Layer "GND_L02_P002" (solid, pour order 2): 0.5,1.5 ccw(c1.5,1.5) 1.5,0.5 42.649,0.5 ccw(c42.649,2.555) 44.102,1.102 ccw(c41.934,3.27) 45,3.27 45,9.23 ccw(c41.934,9.23) 44.102,11.398 43.898,11.602 cw(c46.066,13.77) 43,13.77 43,17.149 ccw(c40.945,17.149) 42.398,18.602 cw(c44.566,20.77) 41.5,20.77 41.5,28.23 cw(c44.566,28.23) 42.398,30.398 42.602,30.602 cw(c44.77,28.434) 44.77,31.5 51.649,31.5 ccw(c51.649,33.555) 53.102,32.102 ccw(c50.934,34.27) 54,34.27 54,44.086 ccw(c51.793,44.086) 53.354,45.646 ccw(c52.5,44.793) 52.5,46 8,46 ccw(c8,45) 7,45 7,40.5 cw(c6.5,40.5) 6.5,40 1.5,40 ccw(c1.5,39) 0.5,39

## Keep-outs
Keep-Out Layer:
  the board outline again, w0.254

## Other copper
Top Layer:
  region net GND: 14.875,37.9 16.625,37.9 16.625,36.5 14.875,36.5
  region net 5V: 11.625,12.25 11.625,11.25 11.1,11.25 11.1,12.25
  region net 5V: 3.6,23.2 cw(c4.083,23.683) 3.4,23.683 3.4,34.134 cw(c4.766,34.134) 3.8,35.1 cw(c4.524,34.376) 4.524,35.4 5.4,35.4 cw(c5.4,34.193) 6.254,35.046 cw(c5.9,34.693) 6.4,34.693 6.4,33.331 ccw(c9.131,33.331) 7.2,31.4 cw(c6.476,30.676) 7.5,30.676 7.5,27.107 ccw(c9.207,27.107) 8,25.9 ccw(c8.483,26.383) 8.483,25.7 8.917,25.7 cw(c8.917,25.017) 9.4,25.5 9.405,25.495 cw(c8.934,25.024) 9.6,25.024 9.6,23.683 cw(c8.917,23.683) 9.4,23.2 cw(c8.917,23.683) 8.917,23 4.083,23 cw(c4.083,23.683)
  region net +12V: 12.2,14.459 ccw(c11.859,14.459) 12.1,14.7 ccw(c11.617,14.217) 11.617,14.9 9.141,14.9 cw(c9.141,15.241) 8.9,15 cw(c9.141,15.241) 8.8,15.241 8.8,15.359 cw(c9.141,15.359) 8.9,15.6 cw(c9.141,15.359) 9.141,15.7 13.476,15.7 cw(c13.476,14.676) 14.2,15.4 ccw(c14.924,16.124) 14.924,15.1 17.234,15.1 cw(c17.234,13.734) 18.2,14.7 cw(c17.959,14.459) 18.3,14.459 ccw(c19.407,14.459) 18.624,13.676 20.017,12.283 cw(c19.335,11.6) 20.3,11.6 cw(c19.576,11.6) 20.088,11.088 cw(c19.634,11.541) 19.634,10.9 cw(c19.476,12.29) 18.605,11.195 18.2,11.5 ccw(c16.544,9.74) 17.4,12 ccw(c16.289,10.132) 16.6,12.283 15.866,12.4 cw(c15.866,13.766) 14.9,12.8 14.854,12.846 ccw(c14,11.993) 14,13.2 12.541,13.2 cw(c12.541,13.541) 12.3,13.3 cw(c12.541,13.541) 12.2,13.541
  region net NetD1_2: 2,16.2 ccw(c2.483,16.683) 2.483,16 6.159,16 ccw(c6.159,16.341) 6.4,16.1 ccw(c6.159,16.341) 6.5,16.341 6.5,16.559 ccw(c6.159,16.559) 6.4,16.8 ccw(c6.159,16.559) 6.159,16.9 3.683,16.9 cw(c3.683,17.583) 3.2,17.1 cw(c3.683,17.583) 3,17.583 3,18.417 cw(c3.683,18.417) 3.2,18.9 cw(c3.683,18.417) 3.683,19.1 12.805,19.1 ccw(c12.805,20.536) 13.821,19.521 14.029,19.729 ccw(c13.376,20.383) 14.3,20.383 14.3,20.976 ccw(c13.276,20.976) 14,21.7 ccw(c13.034,20.734) 13.034,22.1 3.931,22.1 ccw(c3.931,19.369) 2,21.3 ccw(c2.966,20.334) 1.6,20.334 1.6,17.166 ccw(c2.966,17.166)
  region net NetR2_2: 5.9,11 cw(c6.141,11.241) 5.8,11.241 5.8,12.059 cw(c6.141,12.059) 5.9,12.3 cw(c6.383,11.817) 6.383,12.5 6.451,12.5 ccw(c6.451,12.859) 6.705,12.605 ccw(c6.234,13.076) 6.9,13.076 cw(c7.924,13.076) 7.2,13.8 cw(c8.649,12.351) 8.649,14.4 11.017,14.4 cw(c11.017,13.717) 11.5,14.2 cw(c11.259,13.959) 11.6,13.959 11.6,13.8 cw(c11.117,13.8) 11.459,13.459 11.4,13.4 cw(c11.159,13.641) 11.159,13.3 9.441,13.3 ccw(c9.441,12.717) 9.029,13.129 ccw(c9.341,12.817) 8.9,12.817 8.9,12.741 ccw(c9.241,12.741) 9,12.5 cw(c8.276,11.776) 9.3,11.776 9.3,11.466 cw(c8.9,11.466) 9.183,11.183 cw(c8.5,11.866) 8.5,10.9 6.141,10.9 cw(c6.141,11.241)
  region net 5V: 10.341,10.775 12.6,10.775 cw(c12.6,10.076) 13.094,10.57 14.482,9.182 ccw(c16.19,10.89) 16.19,8.475 19.81,8.475 ccw(c19.81,9.2) 20.323,8.687 ccw(c19.593,9.417) 20.625,9.417 ccw(c19.917,9.417) 20.418,9.918 ccw(c19.917,9.417) 19.917,10.125 17.5,10.125 cw(c17.533,13.587) 15.062,11.162 14.6,11.624 13.962,12.262 ccw(c13.242,11.46) 13.6,12.477 ccw(c12.602,9.414) 12.351,12.625 10.5,12.625 ccw(c10.5,12.117) 10.141,12.477 10.118,12.454 ccw(c10.948,11.624) 9.775,11.624 ccw(c10.824,11.624) 10.082,10.882 ccw(c10.341,11.141)
  region net NetCON3_1: 49.275,8.883 49.275,10.917 cw(c49.983,10.917) 49.482,11.418 cw(c50.224,10.676) 50.224,11.725 50.476,11.725 ccw(c50.476,12.724) 51.182,12.018 54.582,15.418 ccw(c54.6,15.4) 54.582,15.418 ccw(c53.151,16.849) 55.175,16.849 55.175,17.93 ccw(c52.134,17.93) 54.284,20.08 53.684,20.68 53.431,20.934 ccw(c53.449,20.951) 53.431,20.933 53.431,20.934 ccw(c51.4,18.903) 51.4,21.775 48.231,21.775 cw(c48.231,24.531) 46.282,22.582 cw(c47.507,23.807) 45.775,23.807 45.775,24.351 cw(c47.849,24.351) 46.382,25.818 46.799,26.235 cw(c47.5,25.534) 47.5,26.525 56.83,26.525 cw(c56.83,23.434) 59.016,25.62 cw(c57.545,24.149) 59.625,24.149 59.625,16.759 cw(c57.044,16.759) 58.869,14.934 cw(c58.851,14.951) 58.869,14.933 58.869,14.934 55.118,11.182 54.701,10.765 ccw(c54.683,10.783) 54.701,10.765 cw(c54.683,10.783) 54.701,10.765 cw(c55.368,10.104) 54.701,10.765 ccw(c55.366,10.1) 54.425,10.1 54.425,8.783 cw(c53.717,8.783) 54.218,8.282 cw(c53.234,9.266) 53.234,7.875 50.707,7.875 cw(c50.707,9.607) 49.482,8.382 cw(c49.983,8.883)
  region net NetCON3_2: 57.8,7.6 cw(c59.249,9.049) 57.2,9.049 57.2,10.051 cw(c59.249,10.051) 57.8,11.5 cw(c59.007,10.293) 59.007,12 60.8,12 ccw(c60.8,14.414) 62.507,12.707 62.6,12.8 ccw(c61.634,13.766) 63,13.766 63,26.33 cw(c66.066,26.33) 63.898,28.498 66.302,30.902 ccw(c64.134,33.07) 67.2,33.07 67.2,40.01 ccw(c64.81,40.01) 66.5,41.7 65.612,42.588 ccw(c65.1,42.076) 65.1,42.8 61.341,42.8 ccw(c61.341,42.459) 61.1,42.7 60.978,42.578 ccw(c62.856,40.7) 60.2,40.7 cw(c58.027,40.7) 59.564,39.164 cw(c58.927,39.8) 58.927,38.9 57.449,38.9 cw(c57.449,40.949) 56,39.5 cw(c56.724,40.224) 55.7,40.224 55.7,43.23 cw(c58.766,43.23) 56.598,45.398 56.802,45.602 cw(c58.97,43.434) 58.97,46.5 68.23,46.5 cw(c68.23,43.434) 70.398,45.602 cw(c68.703,43.907) 71.1,43.907 71.1,9.693 cw(c68.703,9.693) 70.398,7.998 cw(c68.23,10.166) 68.23,7.1 59.007,7.1 cw(c59.007,8.807)
Bottom Layer:
  region net 5V: 7,30.375 4.15,30.375 4.15,25.4 7,25.4 7,29.275
  region net 5V: 4.15,25.4 8.525,25.4 8.525,23.8 4.15,23.8
  region net 5V: 3.998,11.102 cw(c6.166,13.27) 3.1,13.27 3.1,34.151 cw(c5.149,34.151) 3.7,35.6 cw(c4.907,34.393) 4.907,36.1 5.134,36.1 cw(c5.134,34.734) 6.1,35.7 cw(c5.617,35.217) 6.3,35.217 6.3,33.383 ccw(c6.983,33.383) 6.5,32.9 ccw(c7.707,34.107) 7.707,32.4 18.617,32.4 cw(c18.617,31.717) 19.1,32.2 cw(c18.617,31.717) 19.3,31.717 19.3,31.083 cw(c18.617,31.083) 19.1,30.6 cw(c18.859,30.841) 18.859,30.5 10.824,30.5 ccw(c10.824,29.476) 10.1,30.2 ccw(c11.307,28.993) 9.6,28.993 9.6,25.024 ccw(c10.624,25.024) 9.9,24.3 ccw(c11.831,26.231) 11.831,23.5 15.6,23.5 cw(c15.6,22.534) 16.283,23.217 18.3,21.2 ccw(c19.99,22.89) 19.99,20.5 20.976,20.5 cw(c20.976,19.476) 21.7,20.2 cw(c21.217,19.717) 21.9,19.717 21.9,19.3 cw(c21.417,19.3) 21.759,18.959 21.7,18.9 cw(c21.217,19.383) 21.217,18.7 20.07,18.7 cw(c20.07,21.766) 17.902,19.598 16.098,21.402 ccw(c13.93,19.234) 13.93,22.3 9.607,22.3 ccw(c9.607,20.593) 8.4,21.8 ccw(c10.09,20.11) 7.7,20.11 7.7,14.383 ccw(c8.383,14.383) 7.9,13.9 ccw(c9.831,15.831) 9.831,13.1 11.117,13.1 cw(c11.117,12.417) 11.6,12.9 cw(c10.151,11.451) 12.2,11.451 12.2,11.241 cw(c11.859,11.241) 12.1,11 cw(c11.134,11.966) 11.134,10.6 5.21,10.6 cw(c5.21,12.314)
  region net 5V: 18.582,8.382 cw(c19.083,8.883) 18.375,8.883 18.375,8.934 cw(c19.766,8.934) 18.782,9.918 cw(c19.283,9.417) 19.283,10.125 40.393,10.125 ccw(c40.393,11.807) 41.582,10.618 ccw(c40.876,11.324) 41.875,11.324 41.875,22.93 ccw(c38.834,22.93) 40.984,25.08 ccw(c40.032,24.128) 40.032,25.475 30.783,25.475 cw(c30.783,26.183) 30.282,25.682 cw(c30.783,26.183) 30.075,26.183 cw(c30.624,26.183) 30.236,26.572 cw(c30.607,26.2) 30.607,26.725 37.393,26.725 ccw(c37.393,28.407) 38.582,27.218 cw(c38.6,27.2) 38.582,27.218 ccw(c37.876,27.924) 38.875,27.924 38.875,35.03 cw(c41.966,35.03) 39.78,37.216 42.987,40.423 cw(c44.2,39.21) 44.2,40.925 44.376,40.925 cw(c44.376,39.876) 45.118,40.618 cw(c44.617,40.117) 45.325,40.117 45.325,40 cw(c44.334,40) 45.035,39.299 cw(c45.017,39.317) 45.035,39.299 41.918,36.182 ccw(c41.9,36.2) 41.918,36.182 cw(c41.9,36.2) 41.918,36.182 cw(c43.841,34.278) 41.918,36.182 ccw(c43.831,34.269) 41.125,34.269 41.125,28.87 ccw(c44.166,28.87) 42.016,26.72 cw(c41.998,26.702) 42.016,26.72 42.72,26.016 ccw(c42.702,25.998) 42.72,26.016 cw(c40.534,23.83) 43.625,23.83 43.625,8.883 cw(c42.917,8.883) 43.418,8.382 cw(c42.434,9.366) 42.434,7.975 19.6,7.975 cw(c19.6,8) 19.583,7.981 cw(c19.566,8) 19.566,7.975 cw(c19.566,9.366)
  region net NetCON2_1: 14,4.624 14,18.176 cw(c15.024,18.176) 14.3,18.9 14.371,18.971 cw(c15.166,18.176) 15.166,19.3 16.634,19.3 cw(c16.634,17.934) 17.6,18.9 cw(c16.876,18.176) 17.9,18.176 17.9,16.924 cw(c16.876,16.924) 17.6,16.2 ccw(c18.324,15.476) 17.3,15.476 17.3,5.007 cw(c15.593,5.007) 16.8,3.8 cw(c16.076,4.524) 16.076,3.5 15.266,3.5 cw(c15.266,4.866) 14.3,3.9 cw(c15.024,4.624)
  region net NetCON3_1: 49.275,8.883 49.275,10.917 cw(c49.983,10.917) 49.482,11.418 cw(c50.224,10.676) 50.224,11.725 50.476,11.725 ccw(c50.476,12.724) 51.182,12.018 54.582,15.418 ccw(c54.6,15.4) 54.582,15.418 ccw(c53.151,16.849) 55.175,16.849 55.175,17.93 ccw(c52.134,17.93) 54.284,20.08 53.684,20.68 53.431,20.934 ccw(c53.449,20.951) 53.431,20.933 53.431,20.934 ccw(c51.4,18.903) 51.4,21.775 48.231,21.775 cw(c48.231,24.531) 46.282,22.582 cw(c47.507,23.807) 45.775,23.807 45.775,24.351 cw(c47.849,24.351) 46.382,25.818 46.799,26.235 cw(c47.5,25.534) 47.5,26.525 56.83,26.525 cw(c56.83,23.434) 59.016,25.62 cw(c57.545,24.149) 59.625,24.149 59.625,16.759 cw(c57.044,16.759) 58.869,14.934 cw(c58.851,14.951) 58.869,14.933 58.869,14.934 55.118,11.182 54.701,10.765 ccw(c54.683,10.783) 54.701,10.765 cw(c54.683,10.783) 54.701,10.765 cw(c55.368,10.104) 54.701,10.765 ccw(c55.366,10.1) 54.425,10.1 54.425,8.783 cw(c53.717,8.783) 54.218,8.282 cw(c53.234,9.266) 53.234,7.875 50.707,7.875 cw(c50.707,9.607) 49.482,8.382 cw(c49.983,8.883)
  region net NetCON3_2: 57.8,7.6 cw(c59.249,9.049) 57.2,9.049 57.2,10.051 cw(c59.249,10.051) 57.8,11.5 cw(c59.007,10.293) 59.007,12 60.8,12 ccw(c60.8,14.414) 62.507,12.707 62.6,12.8 ccw(c61.634,13.766) 63,13.766 63,26.33 cw(c66.066,26.33) 63.898,28.498 66.302,30.902 ccw(c64.134,33.07) 67.2,33.07 67.2,40.01 ccw(c64.81,40.01) 66.5,41.7 65.612,42.588 ccw(c65.1,42.076) 65.1,42.8 61.341,42.8 ccw(c61.341,42.459) 61.1,42.7 60.978,42.578 ccw(c62.856,40.7) 60.2,40.7 cw(c58.027,40.7) 59.564,39.164 cw(c58.927,39.8) 58.927,38.9 57.449,38.9 cw(c57.449,40.949) 56,39.5 cw(c56.724,40.224) 55.7,40.224 55.7,43.23 cw(c58.766,43.23) 56.598,45.398 56.802,45.602 cw(c58.97,43.434) 58.97,46.5 68.23,46.5 cw(c68.23,43.434) 70.398,45.602 cw(c68.703,43.907) 71.1,43.907 71.1,9.693 cw(c68.703,9.693) 70.398,7.998 cw(c68.23,10.166) 68.23,7.1 59.007,7.1 cw(c59.007,8.807)

## Silkscreen, mask and mechanical layers (free items; w line width, h text height)
Bottom Solder:
  region: 49.275,8.883 49.275,10.917 cw(c49.983,10.917) 49.482,11.418 cw(c50.224,10.676) 50.224,11.725 50.476,11.725 ccw(c50.476,12.724) 51.182,12.018 54.582,15.418 ccw(c54.6,15.4) 54.582,15.418 ccw(c53.151,16.849) 55.175,16.849 55.175,17.93 ccw(c52.134,17.93) 54.284,20.08 53.684,20.68 53.431,20.934 ccw(c53.449,20.951) 53.431,20.933 53.431,20.934 ccw(c51.4,18.903) 51.4,21.775 48.231,21.775 cw(c48.231,24.531) 46.282,22.582 cw(c47.507,23.807) 45.775,23.807 45.775,24.351 cw(c47.849,24.351) 46.382,25.818 46.799,26.235 cw(c47.5,25.534) 47.5,26.525 56.83,26.525 cw(c56.83,23.434) 59.016,25.62 cw(c57.545,24.149) 59.625,24.149 59.625,16.759 cw(c57.044,16.759) 58.869,14.934 cw(c58.851,14.951) 58.869,14.933 58.869,14.934 55.118,11.182 54.701,10.765 ccw(c54.683,10.783) 54.701,10.765 cw(c54.683,10.783) 54.701,10.765 cw(c55.368,10.104) 54.701,10.765 ccw(c55.366,10.1) 54.425,10.1 54.425,8.783 cw(c53.717,8.783) 54.218,8.282 cw(c53.234,9.266) 53.234,7.875 50.707,7.875 cw(c50.707,9.607) 49.482,8.382 cw(c49.983,8.883)
  region: 57.8,7.6 cw(c59.249,9.049) 57.2,9.049 57.2,10.051 cw(c59.249,10.051) 57.8,11.5 cw(c59.007,10.293) 59.007,12 60.8,12 ccw(c60.8,14.414) 62.507,12.707 62.6,12.8 ccw(c61.634,13.766) 63,13.766 63,26.33 cw(c66.066,26.33) 63.898,28.498 66.302,30.902 ccw(c64.134,33.07) 67.2,33.07 67.2,40.01 ccw(c64.81,40.01) 66.5,41.7 65.612,42.588 ccw(c65.1,42.076) 65.1,42.8 61.341,42.8 ccw(c61.341,42.459) 61.1,42.7 60.978,42.578 ccw(c62.856,40.7) 60.2,40.7 cw(c58.027,40.7) 59.564,39.164 cw(c58.927,39.8) 58.927,38.9 57.449,38.9 cw(c57.449,40.949) 56,39.5 cw(c56.724,40.224) 55.7,40.224 55.7,43.23 cw(c58.766,43.23) 56.598,45.398 56.802,45.602 cw(c58.97,43.434) 58.97,46.5 68.23,46.5 cw(c68.23,43.434) 70.398,45.602 cw(c68.703,43.907) 71.1,43.907 71.1,9.693 cw(c68.703,9.693) 70.398,7.998 cw(c68.23,10.166) 68.23,7.1 59.007,7.1 cw(c59.007,8.807)
Mechanical 1:
  lines w0.254: 0,41 6,41 6,47 ; 0,41 0,46 cw(c1,46) 1,47 6,47 ; 0,41 0,2 0,1 ccw(c1,1) 1,0 2,0 66,0 ; 6,47 68,47 71,47 cw(c71,46) 72,46 72,43 72,6 ; 66,0 66,6 72,6 ; 66,0 71,0 ccw(c71,1) 72,1 72,6
Mechanical 13:
  drawing of 318 lines, arcs and shapes, not listed
Mechanical 15:
  lines w0.05: 7,45 cw(c8,45) 8,46 46.23,46 52.5,46 cw(c52.5,44.793) 53.354,45.646 cw(c51.793,44.086) 54,44.086 54,34.27 cw(c50.934,34.27) 53.102,32.102 cw(c51.649,33.555) 51.649,31.5 44.77,31.5 ccw(c44.77,28.434) 42.602,30.602 42.398,30.398 ccw(c44.566,28.23) 41.5,28.23 41.5,20.77 ccw(c44.566,20.77) 42.398,18.602 cw(c40.945,17.149) 43,17.149 43,13.77 ccw(c46.066,13.77) 43.898,11.602 44.102,11.398 cw(c41.934,9.23) 45,9.23 45,3.27 cw(c41.934,3.27) 44.102,1.102 cw(c42.649,2.555) 42.649,0.5 1.5,0.5 cw(c1.5,1.5) 0.5,1.5 0.5,39 cw(c1.5,39) 1.5,40 6.5,40 ccw(c6.5,40.5) 7,40.5 7,45 ; 7,45 7,45

## Text inside footprints (layer, text, board x,y; h text height)
CON3: Top Overlay "HB9500 300V-20A" at 48.5,1.5 h1